# Altium PCB GRLV_Double_30v_v0.2.PcbDoc
Units mil, origin at the board's own origin, x right, y up, seen from the top; angles counter-clockwise.
Board outline 3600 x 4860 mil, 2 copper layers (Top Layer, Bottom Layer); 88 components, 45 nets, 221 pads, 4 vias.
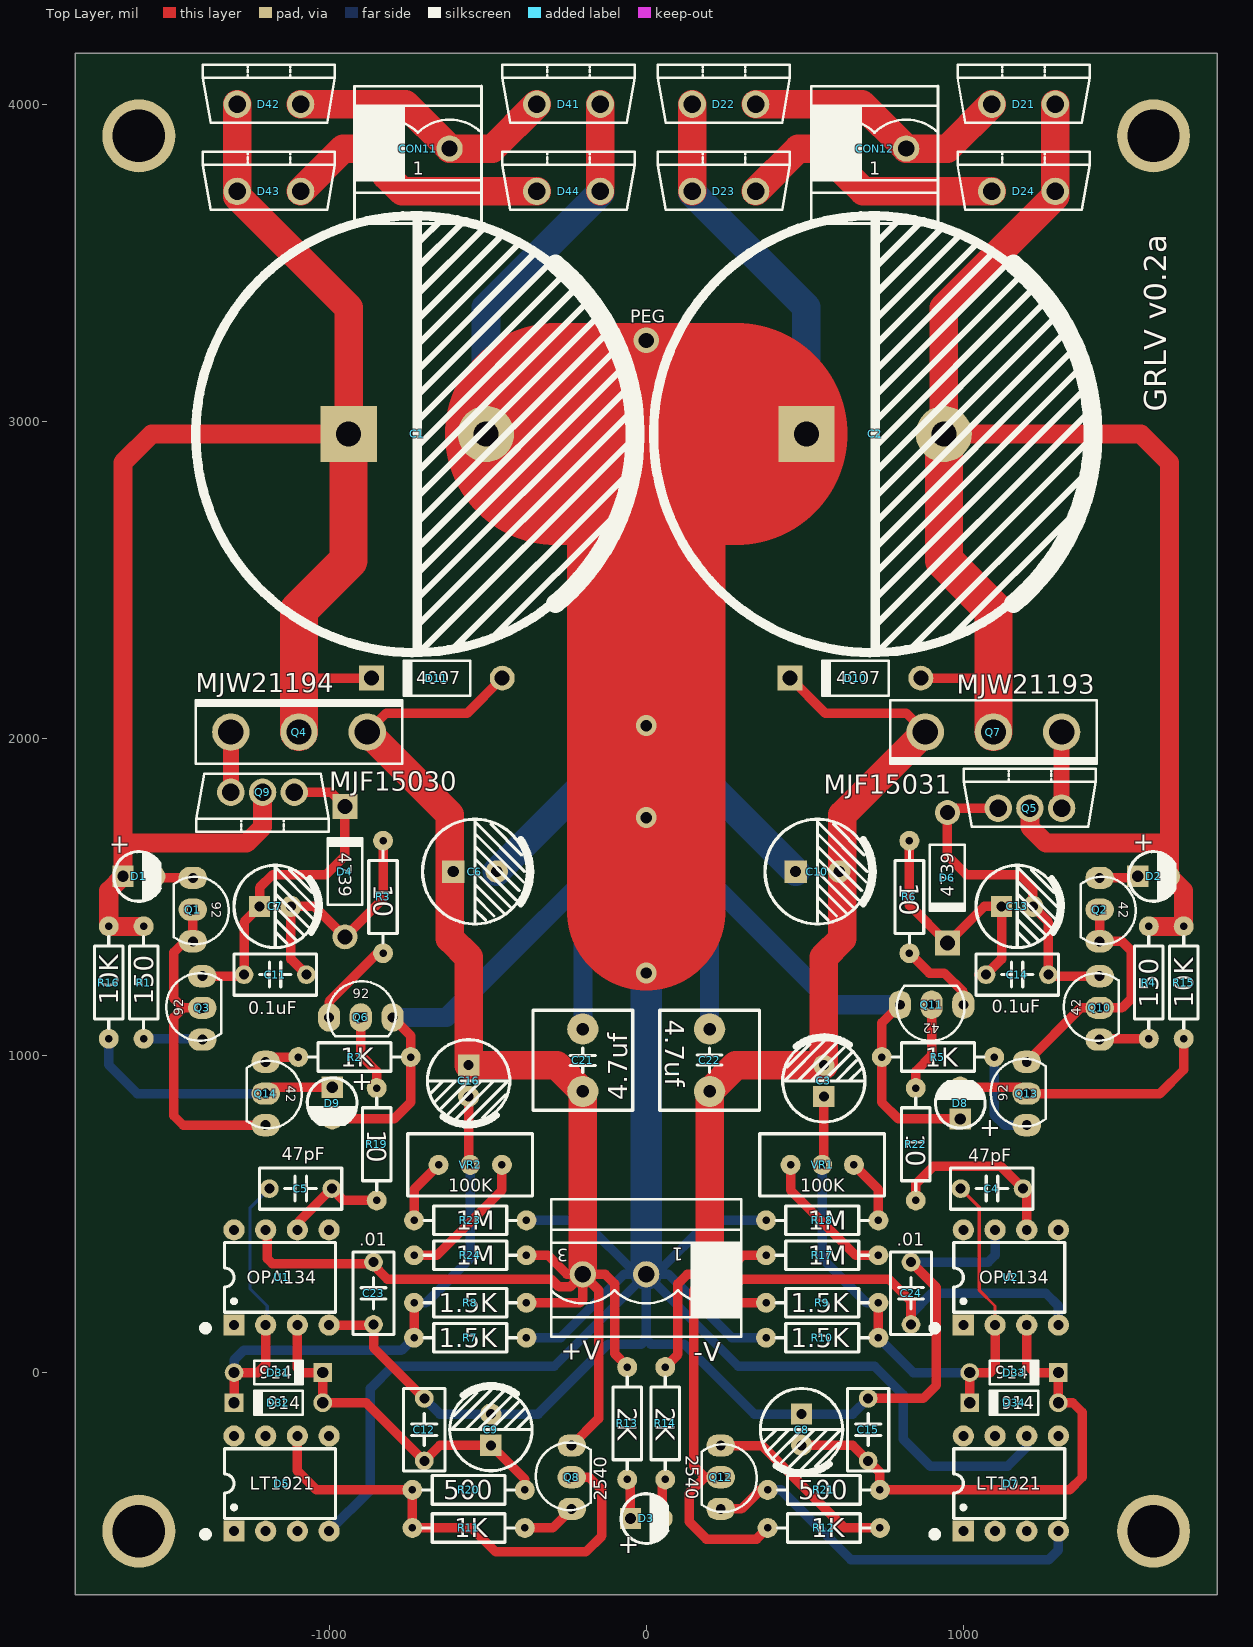
[diagram p0: Top Layer view]
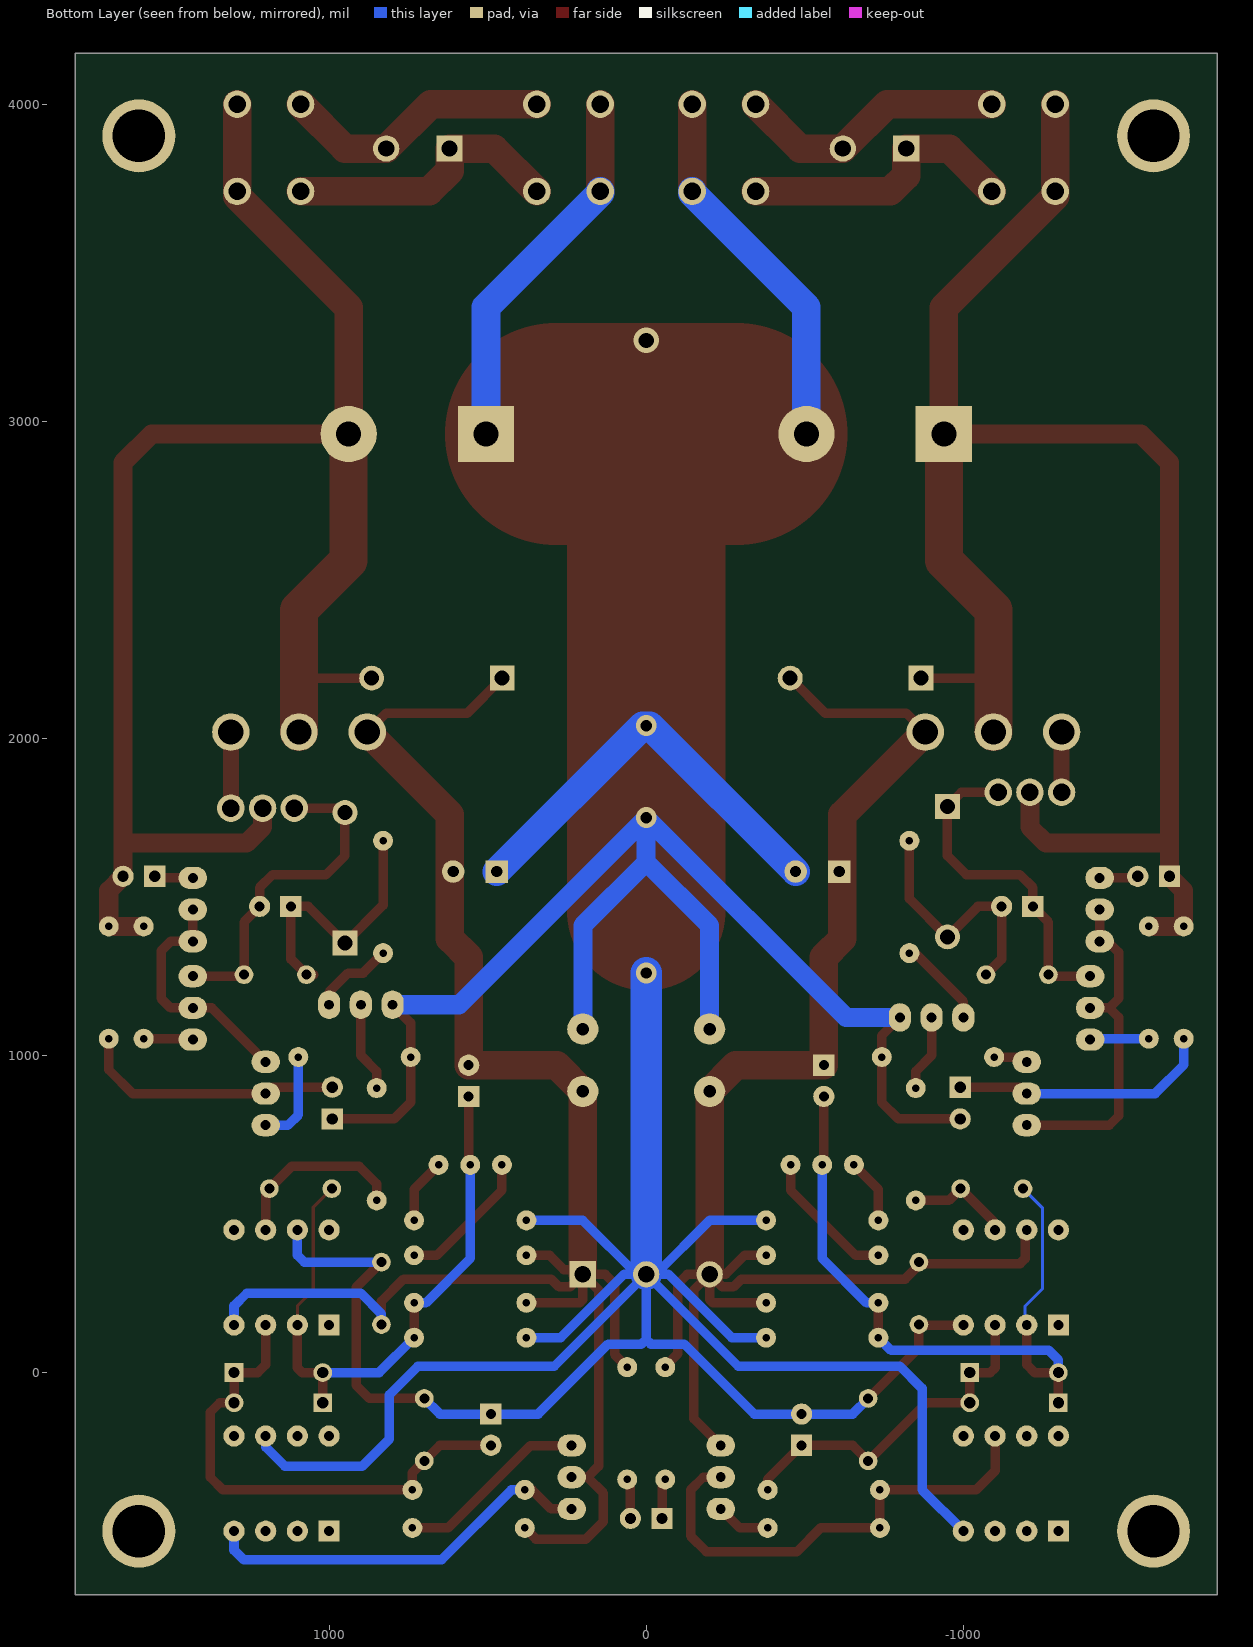
[diagram p1: Bottom Layer view, seen from below]

## Layer stack, top to bottom
Top Solder: solder mask 0.4, Solder Resist, Dk 3.5
Top Layer: signal copper 2.8
Dielectric 1: dielectric 12.6, FR-4, Dk 4.8
Bottom Layer: signal copper 2.8
Bottom Solder: solder mask 0.4, Solder Resist, Dk 3.5

## Board outline
-1800,-700 -1800,4160 1800,4160 1800,-700

## Design rules (kind name [scope] priority, off if disabled: settings)
Clearance [All] p1: gap=10 ignorepadtopadclearanceinfootprint=FALSE except(0: Arc-Hole Track-Hole SMDPad-Hole THPad-Hole Via-Hole Fill-Hole Poly-Hole Region-Hole Text-Hole)
PlaneClearance [All] p1: clearance=30
PlaneConnect [All] p1: planeconnectstyle=Relief reliefexpansion=20 reliefentries=4 reliefconductorwidth=20 reliefairgap=30
PolygonConnect [All] p1: thpad.connectstyle=Relief thpad.reliefconductorwidth=20 thpad.reliefentries=4 thpad.polygonreliefangle="45 Angle" thpad.airgapwidth=20 smdpad.connectstyle=Relief smdpad.reliefconductorwidth=20 smdpad.reliefentries=4 smdpad.polygonreliefangle="90 Angle" smdpad.airgapwidth=20 via.connectstyle=Relief via.reliefconductorwidth=20 via.reliefentries=4 via.polygonreliefangle="45 Angle" via.airgapwidth=20
RoomDefinition GRLV_double_30v_v0.2 [InComponentClass('GRLV_double_30v_v0.2')] p1: confinementstyle=ConfineIn formatcopy=TRUE lockcomponents=FALSE outline 3180,-600 23330,-600 23330,450 3180,450
RoutingVias [All] p1: holewidth=28 width=50 viastyle="Through Hole" minholewidth=28 minwidth=50 maxholewidth=28 maxwidth=50
SolderMaskExpansion [All] p1: expansion=4
Width [All] p1: maxlimit=700 minlimit=10 preferedwidth=30
28 further rules are at their usual default settings.

## Components (designator, comment, footprint, x,y, rotation, side; value= is the part's Value field where it differs from the comment)
-V "+V" HX5.08-3S 200,310 r180 top (schematic designator CON2)
C1 "4700UF/35V" "CAP 11*35*60" -721.85,2960 r0 top
C2 "4700UF/35V" "CAP 11*35*60" 721.85,2960 r0 top
C3 "10UF" "CAP 2.5*6.3*7" 560,920 r90 top
C4 "47pF" "CBB 6.3*6.3*5" 1090,580 r180 top
C5 "47pF" "CBB 6.3*6.3*5" -1090,580 r180 top
C6 "220UF/35V" "CAP 3.5*8*11.5" -540,1580 r0 top
C7 "47UF" "CAP 2.5*6.3*11.2" -1170,1470 r0 top
C8 "47UF" "CAP 2.5*6.3*11.2" 490,-180 r270 top
C9 "47UF" "CAP 2.5*6.3*11.2" -490,-180 r90 top
C10 "220UF/35V" "CAP 3.5*8*11.5" 540,1580 r0 top
C11 "0.1uF" "CBB 6.3*6.3*5" -1170,1255 r0 top
C12 "0.1uF" "CBB 6.3*6.3*5" -700,-180 r90 top
C13 "47UF" "CAP 2.5*6.3*11.2" 1170,1470 r0 top
C14 "0.1uF" "CBB 6.3*6.3*5" 1170,1255 r0 top
C15 "0.1uF" "CBB 6.3*6.3*5" 700,-180 r90 top
C16 "10UF" "CAP 2.5*6.3*7" -560,920 r270 top
C21 "4.7uf" "CBB 7.2*7.2*13" -200,985 r90 top
C22 "4.7uf" "CBB 7.2*7.2*13" 200,985 r270 top
C23 ".01" "CBB 6.3*6.3*5" -860,250 r90 top value=0.01uF
C24 ".01" "CBB 6.3*6.3*5" 835,250 r270 top value=0.01uF
CON11 "AC220-2" HX5.08-2S -720,3860 r0 top
CON12 "AC220-2" HX5.08-2S 720,3860 r0 top
D1 "+" "LED 3MM-R" -1600,1565 r0 top
D2 "+" "LED 3MM-R" 1600,1565 r0 top
D3 "+" "LED 3MM-R" 0,-460 r0 top
D4 "4739" DO-41 -950,1580 r90 top
D5 "LT1021" DIP8-300_MH -1150,-350 r90 top
D6 "4739" DO-41 950,1560 r270 top
D7 "LT1021" DIP8-300_MH 1150,-350 r90 top
D8 "+" "LED 3MM-R" 990,850 r90 top
D9 "+" "LED 3MM-R" -990,850 r270 top
D10 "4007" DO-41 660,2190 r180 top
D11 "4007" DO-41 -660,2190 r180 top
D21 "HFA08" TO220AC 1090,4000 r0 top
D22 "HFA08" TO220AC 145,4000 r0 top
D23 "HFA08" TO220AC 145,3725 r0 top
D24 "HFA08" TO220AC 1090,3725 r0 top
D31 "914" DO-35 -1160,0 r0 top
D32 "914" DO-35 -1160,-95 r180 top
D33 "914" DO-35 1160,0 r0 top
D34 "914" DO-35 1160,-95 r180 top
D41 "VS-HFA08TB60-M3" TO220AC -345,4000 r0 top
D42 "VS-HFA08TB60-M3" TO220AC -1290,4000 r0 top
D43 "VS-HFA08TB60-M3" TO220AC -1290,3725 r0 top
D44 "VS-HFA08TB60-M3" TO220AC -345,3725 r0 top
Q1 "92" TO92A -1430,1560 r0 top
Q2 "42" TO92A 1430,1560 r0 top
Q3 "92" TO92A -1400,1050 r180 top
Q4 "MJW21194" TO247V -1310,2020 r0 top
Q5 "MJF15031" TO220V 1110,1780 r0 top
Q6 "92" TO92A -1000,1120 r90 top
Q7 "MJW21193" TO247V 1310,2020 r180 top
Q8 "2540" TO92A -235,-430 r180 top
Q9 "MJF15030" TO220V -1110,1830 r180 top
Q10 "42" TO92A 1430,1050 r180 top
Q11 "42" TO92A 1000,1160 r270 top
Q12 "2540" TO92A 235,-230 r0 top
Q13 "92" TO92A 1200,780 r180 top
Q14 "42" TO92A -1200,980 r0 top
R1 "150" "RS 1/4W" -1585,1230 r270 top
R2 "1K" "RS 1/4W" -920,995 r0 top
R3 "10" "RS 1/4W" -830,1500 r270 top
R4 "150" "RS 1/4W" 1585,1230 r90 top
R5 "1K" "RS 1/4W" 920,995 r0 top
R6 "10" "RS 1/4W" 830,1500 r90 top
R7 "1.5K" "RS 1/4W" -555,110 r0 top
R8 "1.5K" "RS 1/4W" -555,220 r180 top
R9 "1.5K" "RS 1/4W" 555,220 r180 top
R10 "1.5K" "RS 1/4W" 555,110 r0 top
R11 "1K" "RS 1/4W" -560,-490 r180 top
R12 "1K" "RS 1/4W" 560,-490 r180 top
R13 "2K" "RS 1/4W" -60,-160 r90 top
R14 "2K" "RS 1/4W" 60,-160 r90 top
R15 "10K" "RS 1/4W" 1695,1230 r90 top
R16 "10K" "RS 1/4W" -1695,1230 r270 top
R17 "1M" "RS 1/4W" 555,370 r180 top
R18 "1M" "RS 1/4W" 555,480 r0 top
R19 "10" "RS 1/4W" -850,720 r270 top
R20 "500" "RS 1/4W" -560,-370 r180 top
R21 "500" "RS 1/4W" 560,-370 r180 top
R22 "10" "RS 1/4W" 850,720 r270 top
R23 "1M" "RS 1/4W" -555,480 r0 top
R24 "1M" "RS 1/4W" -555,370 r180 top
U1 "OPA134" DIP8-300_MH -1150,300 r90 top
U2 "OPA134" DIP8-300_MH 1150,300 r90 top
VR1 "100K" "RS 1/2W-VR" 555,655 r180 top
VR2 "100K" "RS 1/2W-VR" -555,655 r180 top

## Footprints (in the part's own frame and the unit in brackets; to place one, negate y for a bottom-side part, rotate by r counter-clockwise, add the part's x,y. Pads: shape width x height; smd on the part's side, far side on the other; paste and mask are expansions set on the pad)
"CAP 2.5*6.3*7" [mm] "脚距2.5mm直径6.3mm高度7mm"
  rect 1.7x1.7 hole 0.8: 1(-1.25,0)
  round 1.7 hole 0.8: 2(1.25,0)
  silkscreen extent -3.3,-3.3 3.56,3.3, body extent -3.15,-3.15 3.16,3.15, height 7.03
"CAP 2.5*6.3*11.2" [mm] "脚距2.5mm直径6.3mm高度11.2mm"
  rect 1.7x1.7 hole 0.8: 1(-1.25,0)
  round 1.7 hole 0.8: 2(1.25,0)
  silkscreen extent -3.3,-3.3 3.56,3.3, body extent -3.15,-3.15 3.16,3.15, height 11.23
"CAP 3.5*8*11.5" [mm] "脚距3.5mm直径8mm高度11.5mm"
  rect 1.8x1.8 hole 0.9: 1(-1.75,0)
  round 1.8 hole 0.9: 2(1.75,0)
  silkscreen extent -4.2,-4.2 4.5,4.2, body extent -4,-4 4.01,4, height 11.53
"CAP 11*35*60" [mm] "脚距11mm直径35mm高度60mm"
  rect 4.5x4.5 hole 2: 1(-5.5,0)
  round 4.5 hole 2: 2(5.5,0)
  silkscreen extent -17.74,-17.51 17.44,17.49, body extent -17.91,-17.65 17.53,17.65, height 40.03
"CBB 6.3*6.3*5" [mm] "脚距5mm高6.3mm厚3mm"
  round 1.5 hole 0.8: 1(-2.5,0) 2(2.5,0)
  silkscreen extent -3.3,-1.65 3.3,1.65, body extent -3.15,-1.5 3.15,1.5, height 6.8
"CBB 7.2*7.2*13" [mm] "脚距5mm高13mm厚7.2mm"
  round 2.5 hole 1: 1(-2.5,0) 2(2.5,0)
  silkscreen extent -4,-4 4,4, body extent -4,-4 4,4, height 17.53
DIP8-300_MH [mm] "带底座 9.4*7.6*3.8(长宽高）"
  rect 1.7x1.7 hole 0.8: 1(-3.81,3.81)
  round 1.7 hole 0.8: 2(-3.81,1.27) 3(-3.81,-1.27) 4(-3.81,-3.81) 5(3.81,-3.81) 6(3.81,-1.27) 7(3.81,1.27) 8(3.81,3.81)
  silkscreen extent -4.32,-4.32 2.79,6.35, body extent -5,-5.19 5,5.19, height 7.7
DO-35 [mm] "Diode, Axial; Body 3.8 x 1.9 mm (LxDia. max), Lead Dia. 0.53 mm (max)"
  round 1.5 hole 0.9: 1(-3.55,0)
  rect 1.5x1.5 hole 0.9: 2(3.55,0)
  silkscreen extent -1.95,-0.95 2.05,0.95
DO-41 [mm] "Diode, Axial; Body 5.2 x 2.7 mm (LxDia. max), Lead Dia. 0.86 mm (max)"
  round 2 hole 1.2: 1(-5.23,0)
  rect 2x2 hole 1.2: 2(5.23,0)
  silkscreen extent -2.65,-1.4 2.75,1.4
HX5.08-2S [mm]
  rect 2.1x2.1 hole 1.3: 1(-2.54,0)
  round 2.1 hole 1.3: 2(2.54,0)
  silkscreen extent -5.08,-6 5.08,5, body extent -5.04,-5.5 4.96,2.5, height 11
HX5.08-3S [mm]
  rect 2.1x2.1 hole 1.3: 1(0,0)
  round 2.1 hole 1.3: 2(5.08,0) 3(10.16,0)
  silkscreen extent -2.54,-6 12.7,5, body extent -2.5,-5.5 12.5,2.5, height 11
"LED 3MM-R" [mm] "红色3mm直插LED"
  rect 1.7x1.7 hole 0.9: 1(-1.27,0)
  round 1.7 hole 0.9: 2(1.27,0)
  silkscreen extent -2.01,-2 1.72,1.98, body extent -1.95,-1.95 1.64,1.95, height 5.55
"RS 1/2W-VR" [mm] "直插3脚顶调可调电阻，脚距2.54mm，长10mm*宽5mm*高10mm"
  round 1.6 hole 0.6: 1(-2.54,0) 2(2.54,0) 3(0,0)
  silkscreen extent -5,-2.5 5,2.5
"RS 1/4W" [mm] "直插色环电阻，脚距9mm，直径2.3mm"
  round 1.6 hole 0.6: 1(-4.5,0) 2(4.5,0)
  silkscreen extent -3.68,-1.14 3.68,1.14, body extent -4.72,-1.16 4.73,1.16, height 2.32
TO92A [mil]
  oval 90x70 hole 31.5: 1(0,0) 2(0,-100) 3(0,-200)
  silkscreen extent -60,-209 114,4
TO220AC [mm]
  round 2.2 hole 1.397: 1(0,0) 2(5.08,0)
  silkscreen extent -2.75,-1.48 7.83,3.17
TO220V [mm]
  round 2.2 hole 1.397: 1(0,0) 2(2.54,0) 3(5.08,0)
  silkscreen extent -2.75,-1.48 7.83,3.17
TO247V [mm]
  round 3 hole 2.032: 1(0,0) 2(5.461,0) 3(10.922,0)
  silkscreen extent -2.79,-2.54 13.72,2.54

## Part data
-V: library part EDG5.08-3P
C1 C2 C3 C6 C7 C8 C9 C10 C13 C16: library part C-CAP, "直插电解电容", BOM名称=直插电解电容, 学习资源=www.ooocke.com, 版权归属=源创客
C4 C5 C11 C12 C14 C15 C23 C24: library part C-CBB, "CBB电容", BOM名称=CBB电容, 学习资源=www.ooocke.com, 版权归属=源创客
C21 C22: library part C-MKS, "MKS薄膜电容"
D1 D2 D3 D8 D9: library part LED, "直插式LED"
D4 D6: library part 1N4739, "9.1V/1W稳压管"
D5 D7: library part LT1021-10-2P, "10V Precision Reference 2 Pin Config"
D10 D11: library part 1N4007, "整流二极管", BOM名称=整流二极管, 学习资源=www.ooocke.com, 版权归属=源创客
D21 D22 D23 D24: library part VS-HFA08TB60-M3, "Ultrafast Soft Recovery Diado 8A 600V"
D31 D32 D33 D34: library part 1N914, "高速开关管 1V/0.25W"
D41 D42 D43 D44: "Ultrafast Soft Recovery Diado 8A 600V"
Q1 Q3 Q6 Q13: library part KSP92/93, "High Voltage PNP Transistor"
Q2 Q10 Q11 Q14: library part KSP42/43, "High Voltage NPN Transistor"
Q4 Q9: "Power NPN Transistor"
Q5 Q7: "Power PNP Transistor"
Q8 Q12: library part DN2540, "N沟道耗尽型DMOS场效应管 400V/150ma"
R1 R2 R3 R4 R5 R6 R7 R8 R9 R10 R11 R12 R13 R14 R15 R16 R17 R18 R19 R20 R21 R22 R23 R24: library part R-CRR, "直插色环电阻", BOM名称=色环电阻, 学习资源=www.ooocke.com, 版权归属=源创客
U1 U2: library part OPA134PA
VR1 VR2: library part VR-W, "直插可调电阻-顶调"

## Free pads (board coordinates)
  round 230 hole 165: 2(-1600,-500) 2(-1600,3900) 2(1600,-500) 2(1600,3900)

## Via types
v1: diameter 66, hole 36, Top Layer to Bottom Layer, 3 vias
v2: diameter 80, hole 48, Top Layer to Bottom Layer, 1 vias

## Nets (pads, with @x,y where several pads share a name; then routed paths per layer and width w, separated by ;. In a path a pad name is that pad's centre, name@x,y a point inside that pad or via, vN(x,y) a via of type N, cw(c..) or ccw(c..) an arc to the next point about the centre after c; other vN are vias at no path point)
GND: -V.2 C1.2 C2.1 C6.2 C8.1 C9.2 C10.1 C12.2 C15.2 C21.2 C22.1 C23.1 C24.1 D5.4 D7.6 D8.1 D9.2 D22.1 D23.1 D41.2 D44.2 Q6.3 Q11.3 R2.2 R5.1 R7.2 R10.1 R18.1 R23.2 U1.4 U2.7 | length 19490.8
  Top Layer w30: U1.4 -861.57,150 C23.1 -860,78.43 C12.2 ; D9.2 -795,800 -742.83,852.17 R2.2 -742.83,1062.83 Q6.3 ; C15.2 873.43,-81.57 915,-40 915,268.43 C24.1 ; Q11.3 742.83,1102.83 R5.1 742.83,852.17 795,800 D8.1
  Top Layer w90: D44.2 D41.2 ; D23.1 D22.1
  Top Layer w500: 0,1455 v1(0,1750) v1(0,2040) 0,2930 5,2935
  Top Layer w700: -285,2960 285,2960
  Bottom Layer w30: D5.4 -870,-370 -870,-50 -800,20 -290,20 -V.2 ; C12.2 -650.79,-130.79 C9.2 -340.79,-130.79 -120,90 -15,90 0,105 ; R7.2 -270,110 -70,310 -V.2@-30,310 ; R23.2 -200,480 -V.2@-30,310 ; R10.1 270,110 70,310 -V.2@30,310 ; R18.1 200,480 -V.2@30,310 ; C15.2 650.79,-130.79 C8.1 340.79,-130.79 120,90 15,90 0,105 ; C24.1 1078.43,348.43 1100,370 U2.7 ; D7.6 1200,-235 1140,-295 895,-295 810,-210 810,-70 720,20 290,20 -V.2 ; -V.2@-30,310 -V.2 ; 0,105 -V.2 ; -V.2 -V.2@30,310
  Bottom Layer w60: Q6.3 -630,1120 v1(0,1750) ; C21.2 -200,1410 0,1610 ; C22.1 200,1410 0,1610 ; Q11.3 590,1160 v1(0,1750) ; 0,1610 v1(0,1750)
  Bottom Layer w90: C1.2 -505.31,3359.69 -145,3720 D44.2 ; C6.2 -11.1,2040 v1(0,2040) 11.1,2040 C10.1 ; D23.1 145,3720 505.31,3359.69 C2.1
  Bottom Layer w100: -V.2 v1(0,1260)
  other v2: 0,3255
NetC1_1: C1.1 D1.1 D11.2 D42.1 D43.1 Q4.2 Q9.2 R1.1 R16.1 | length 5332.8
  Top Layer w30: -1095,2190 D11.2
  Top Layer w60: R1.1 R16.1 -1695,1520 D1.1 -1650,1675 ; Q9.2 -1210,1720 -1260,1670 -1645,1670 -1650,1675 ; C1.1 -1560,2960 -1650,2870 -1650,1675
  Top Layer w90: D42.1 D43.1 -1290,3710 -938.39,3358.39 C1.1
  Top Layer w120: Q4.2 -1095,2190 -1095,2405 -938.39,2561.61 C1.1
NetC2_2: C2.2 D2.2 D10.1 D21.2 D24.2 Q5.2 Q7.2 R4.2 R15.2 | length 5288.7
  Top Layer w30: D10.1 1095,2190 ; Q7.2@1100,2020 Q7.2@1100,2025.91
  Top Layer w60: C2.2 1560,2960 1650,2870 1650,1675 ; Q5.2 1210,1720 1260,1670 1645,1670 1650,1675 ; R4.2 R15.2 1695,1520 D2.2 1650,1675
  Top Layer w90: C2.2 938.39,3358.39 1290,3710 D24.2 D21.2
  Top Layer w120: C2.2 938.39,2561.61 1095,2405 1095,2190 Q7.2
NetC3_1: C3.1 C4.2 D33.1 D34.2 R9.1 R10.2 U2.2 VR1.3 | length 1982.5
  Top Layer w10: C4.2 1050,521.57 1050,260 1100,210 U2.2
  Top Layer w30: VR1.3 560,660 C3.1 ; R10.2 R9.1 ; D34.2 D33.1 1085,0 1100,15 U2.2
  Bottom Layer w30: VR1.3 555,360 695,220 R9.1 ; R10.2 842.17,0 D33.1
NetC3_2: -V.1 C3.2 C10.2 C22.2 C24.2 D10.2 Q7.3 Q12.2 R9.2 R12.2 R14.2 R17.2 U2.4 | length 6044.2
  Top Layer w30: R14.2 100,57.17 100,280 130,310 -V.1 ; Q12.2 185,-330 ; R9.2 210,220 200,230 -V.1 ; R17.2 305,370 260,325 215,325 -V.1 ; R12.2 347.83,-525 190,-525 135,-470 135,-380 185,-330 ; D10.2 564.09,2080 820,2080 Q7.3 ; C24.2 835,225 765,295 300,295 275,270 240,270 -V.1 ; 185,-330 150,-295 150,260 -V.1
  Top Layer w90: -V.1 200,385 C22.2 282.64,969.21 C3.2 560,1310 618.9,1368.9 618.9,1758.9 Q7.3
  Bottom Layer w30: C24.2 835,185 900,250 1260,250 1300,210 U2.4
NetC4_1: C4.1 R22.2 U2.6 | length 577.2
  Top Layer w30: R22.2 850,595 905,650 1118.43,650 C4.1 1200,568.43 U2.6
NetC5_1: C5.1 R19.2 U1.6 | length 329.8
  Top Layer w30: U1.6@-1095,450 -1095,476.57 C5.1 -954.41,542.83 R19.2
NetC5_2: C5.2 C16.2 D31.1 D32.2 R7.1 R8.2 U1.2 VR2.3 | length 2303.2
  Top Layer w30: D32.2 D31.1 -1225,0 -1200,25 U1.2 ; R7.1 R8.2 ; C16.2 -560,660 VR2.3
  Bottom Layer w10: U1.2@-1195,150 -1195,210 -1250,265 -1250,518.43 C5.2
  Bottom Layer w30: D31.1 -1299.76,40.24 -1270,70 -772.17,70 R7.1 ; R8.2 -695,220 -555,360 VR2.3
NetC6_1: -V.3 C6.1 C16.1 C21.1 C23.2 D11.1 Q4.3 Q8.3 R8.1 R13.2 R24.1 U1.7 | length 5249.3
  Top Layer w30: U1.7@-1195,450 -1195,359.21 -1179.21,343.43 C23.2@-865,343.43 ; Q4.3 -820,2080 -564.09,2080 D11.1 ; C23.2 C23.2@-865,343.43 ; R8.1 -210,220 -200,230 -V.3 ; R24.1 -310,370 -250,310 -V.3 ; Q8.3 -150,-145 -150,260 -V.3 ; R13.2 -60,20 -100,60 -100,280 -130,310 -V.3 ; C23.2@-865,343.43 -816.57,295 -300,295 -275,270 -240,270 -V.3
  Top Layer w90: Q4.3 -618.9,1758.9 -618.9,1368.9 -560,1310 C16.1 -282.64,969.21 C21.1 -V.3
NetC7_1: C7.1 C11.1 D4.2 Q3.3 Q9.1 | length 1073.4
  Top Layer w30: Q3.3 -1273.43,1250 C11.1 -1268.43,1420.79 C7.1 -1219.21,1529.21 -1178.43,1570 -1010,1570 -950,1630 D4.2 -994.09,1830 Q9.1
NetC7_2: C7.2 C11.2 D4.1 R3.1 | length 801.2
  Top Layer w30: C11.2@-1069.09,1255 C11.2 -1120.79,1304.21 C7.2 -1045.91,1470 D4.1 -830,1494.09 R3.1
NetC8_2: C8.2 C15.1 D33.2 D34.1 R21.1 U2.3 | length 1614.5
  Top Layer w30: C8.2 650.79,-229.21 C15.1 737.17,-315.59 R21.1 1335,-370 1375,-330 1375,-125 1345,-95 D34.1 D33.2 1225,0 1200,25 U2.3
NetC9_1: C9.1 C12.1 D31.2 D32.1 R20.1 U1.3 | length 1127.8
  Top Layer w30: U1.3 -1100,15 -1085,0 D31.2 D32.1 -883.43,-95 C12.1 -650.79,-229.21 C9.1 -382.83,-336.38 R20.1
NetC13_1: C13.1 C14.1 D6.2 R6.2 | length 849.4
  Top Layer w30: R6.2 830,1474.09 D6.2 1065.91,1470 C13.1 1120.79,1304.21 C14.1 C14.1@1049.09,1255
NetC13_2: C13.2 C14.2 D6.1 Q5.1 Q10.3 | length 1070.9
  Top Layer w30: Q5.1 964.09,1780 D6.1 950,1630 1010,1570 1178.43,1570 1219.21,1529.21 C13.2 1268.43,1420.79 C14.2 1273.43,1250 Q10.3
NetCON11_1: CON11.1 D43.2 D44.1 | length 906.6
  Top Layer w90: D43.2 -955,3860 CON11.1 -820,3775 -770,3725 D44.1
NetCON11_2: CON11.2 D41.1 D42.2 | length 861
  Top Layer w90: D42.2 -760,4000 CON11.2 -485,3860 D41.1
NetCON12_1: CON12.1 D23.2 D24.1 | length 897.8
  Top Layer w90: D23.2 480,3860 CON12.1 620,3790 685,3725 D24.1
NetCON12_2: CON12.2 D21.1 D22.2 | length 861
  Top Layer w90: D22.2 680,4000 CON12.2 950,3860 D21.1
NetD1_2: D1.2 Q1.1 | length 122.1
  Top Layer w30: D1.2 -1545,1560 Q1.1
NetD2_1: D2.1 Q2.1 | length 129.1
  Top Layer w30: Q2.1@1435,1565 Q2.1 1545,1560 D2.1
NetD3_1: D3.1 R13.1 | length 127
  Top Layer w30: R13.1 -50,-347.17 D3.1
NetD3_2: D3.2 R14.1 | length 127
  Top Layer w30: D3.2 50,-347.17 R14.1
NetD5_6: D5.6 Q8.2 R11.2 R20.2 | length 1523.2
  Top Layer w30: D5.6 -1100,-310 -1040,-370 R20.2 R11.2 -550,-490 -475,-565 -190,-565 -140,-515 -140,-370 -180,-330 Q8.2
NetD7_4: D7.4 Q12.3 R21.2 | length 1268.4
  Top Layer w30: Q12.3@220,-430 Q12.3 300,-430 360,-370 R21.2
  Bottom Layer w30: R21.2 425,-370 645,-590 1270,-590 1300,-560 D7.4
NetD8_2: D8.2 Q13.2 R15.1 | length 842.2
  Top Layer w30: D8.2 1180,900 Q13.2 1620,880 1695,955 R15.1
NetD9_1: D9.1 Q14.2 R16.2 | length 833.4
  Top Layer w30: Q14.2 -1180,900 D9.1
  Bottom Layer w30: R16.2 -1695,970 -1605,880 Q14.2
NetQ1_2: Q1.2 Q1.3 Q3.2 Q14.3 | length 1081.8
  Top Layer w30: Q1.3@-1460,1360 Q1.3@-1455,1360 ; Q1.2 Q1.3 Q1.3@-1455,1360 ; Q3.2 -1460,1150 ; Q14.3 -1460,780 -1490,810 -1490,1120 -1460,1150 ; -1460,1150 -1490,1180 -1490,1325 Q1.3@-1455,1360
NetQ2_2: Q2.2 Q2.3 Q10.2 Q13.3 | length 775.3
  Top Layer w30: Q13.3 1370,1150 Q10.2 1500,1150 1530,1180 1530,1330 1500,1360 Q2.3 Q2.2
NetQ3_1: Q3.1 R1.2 | length 186.2
  Bottom Layer w30: R1.2 -1402.83,1052.83 Q3.1
NetQ4_1: Q4.1 Q9.3 | length 190
  Top Layer w50: Q9.3 Q4.1
NetQ5_3: Q5.3 Q7.1 | length 240
  Top Layer w50: Q5.3 Q7.1
NetQ6_1: Q6.1 R3.2 | length 283.3
  Top Layer w30: Q6.1 -1000,1170 -847.17,1322.83 R3.2
NetQ6_2: Q6.2 R19.1 | length 243.5
  Top Layer w30: Q6.2 -900,1000 -850,950 R19.1
NetQ8_1: Q8.1 R11.1 | length 172.7
  Top Layer w30: R11.1 -295,-490 Q8.1
NetQ10_1: Q10.1 R4.1 | length 156.2
  Top Layer w30: Q10.1 1432.83,1052.83 R4.1
NetQ11_1: Q11.1 R6.1 | length 260.9
  Top Layer w30: R6.1 892.83,1260 940,1260 1000,1200 Q11.1
NetQ11_2: Q11.2 R22.1 | length 283.5
  Top Layer w30: R22.1 850,950 900,1000 Q11.2
NetQ12_1: Q12.1 R12.1 | length 609.9
  Top Layer w30: Q12.1 365,-230 625,-490 R12.1
NetQ13_1: Q13.1 R5.2 | length 298.6
  Bottom Layer w30: R5.2 1097.17,812.83 1130,780 Q13.1
NetQ14_1: Q14.1 R2.1 | length 109
  Top Layer w30: Q14.1 -1185,995 R2.1
NetR17_1: R17.1 VR1.2 | length 442.1
  Top Layer w30: VR1.2 455,575 660,370 R17.1
NetR18_2: R18.2 VR1.1 | length 207
  Top Layer w30: VR1.1 732.17,577.83 R18.2
NetR23_1: R23.1 VR2.2 | length 207
  Top Layer w30: R23.1 -732.17,577.83 VR2.2
NetR24_2: R24.2 VR2.1 | length 442.1
  Top Layer w30: R24.2 -660,370 -455,575 VR2.1
pads on no net: D5.1 D5.2 D5.3 D5.5 D5.7 D5.8 D7.1 D7.2 D7.3 D7.5 D7.7 D7.8 U1.1 U1.5 U1.8 U2.1 U2.5 U2.8

## Silkscreen, mask and mechanical layers (free items; w line width, h text height)
Top Overlay:
  text "PEG" at -50,3310 h40
  text "GRLV v0.2a" at 1640,3030 h70 r90
Mechanical 1:
  the board outline again, w10
Drill Drawing:
  the board outline again, w10

## Text inside footprints (layer, text, board x,y; h text height)
-V: Top Overlay "3" at -246,390 h40 r180; Top Overlay "1" at 117,393 h40 r180
CON11: Top Overlay "1" at -737,3777 h40
CON12: Top Overlay "1" at 703,3777 h40